# EAGLE board atmega8 (EAGLE 7.1.0)
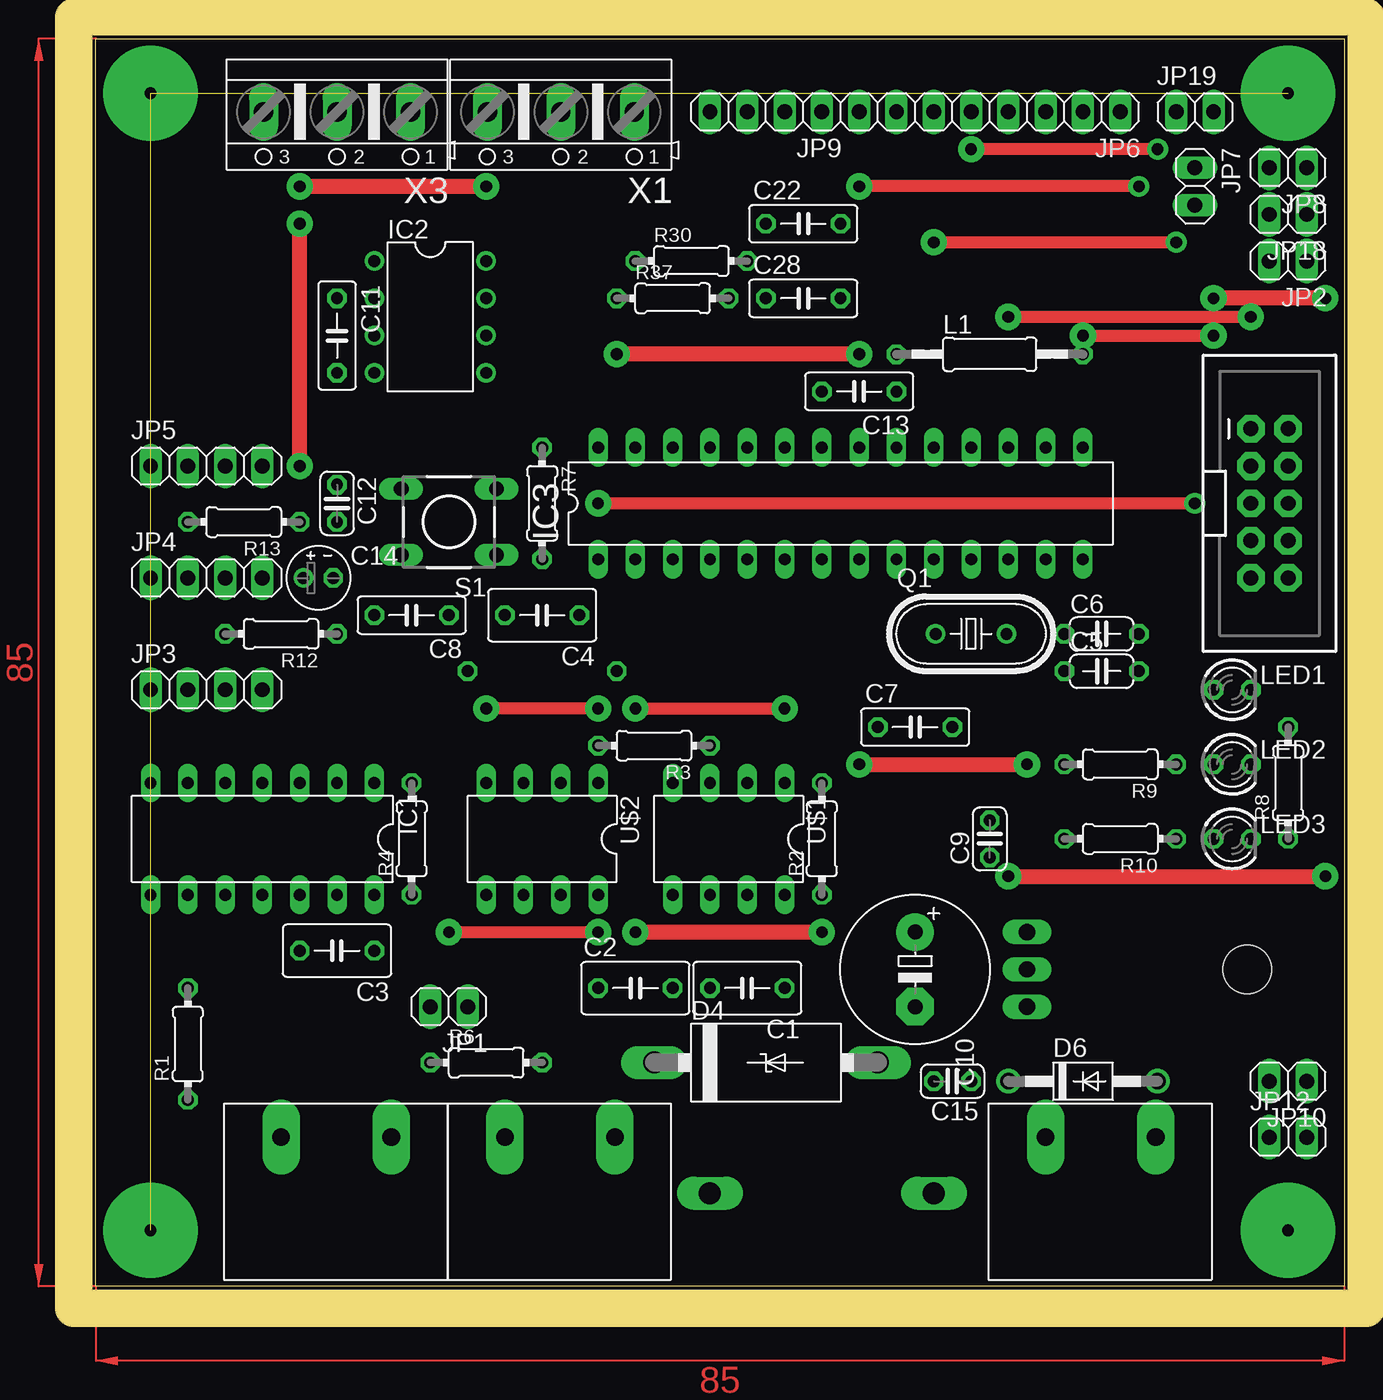
[diagram p0: board, top side]
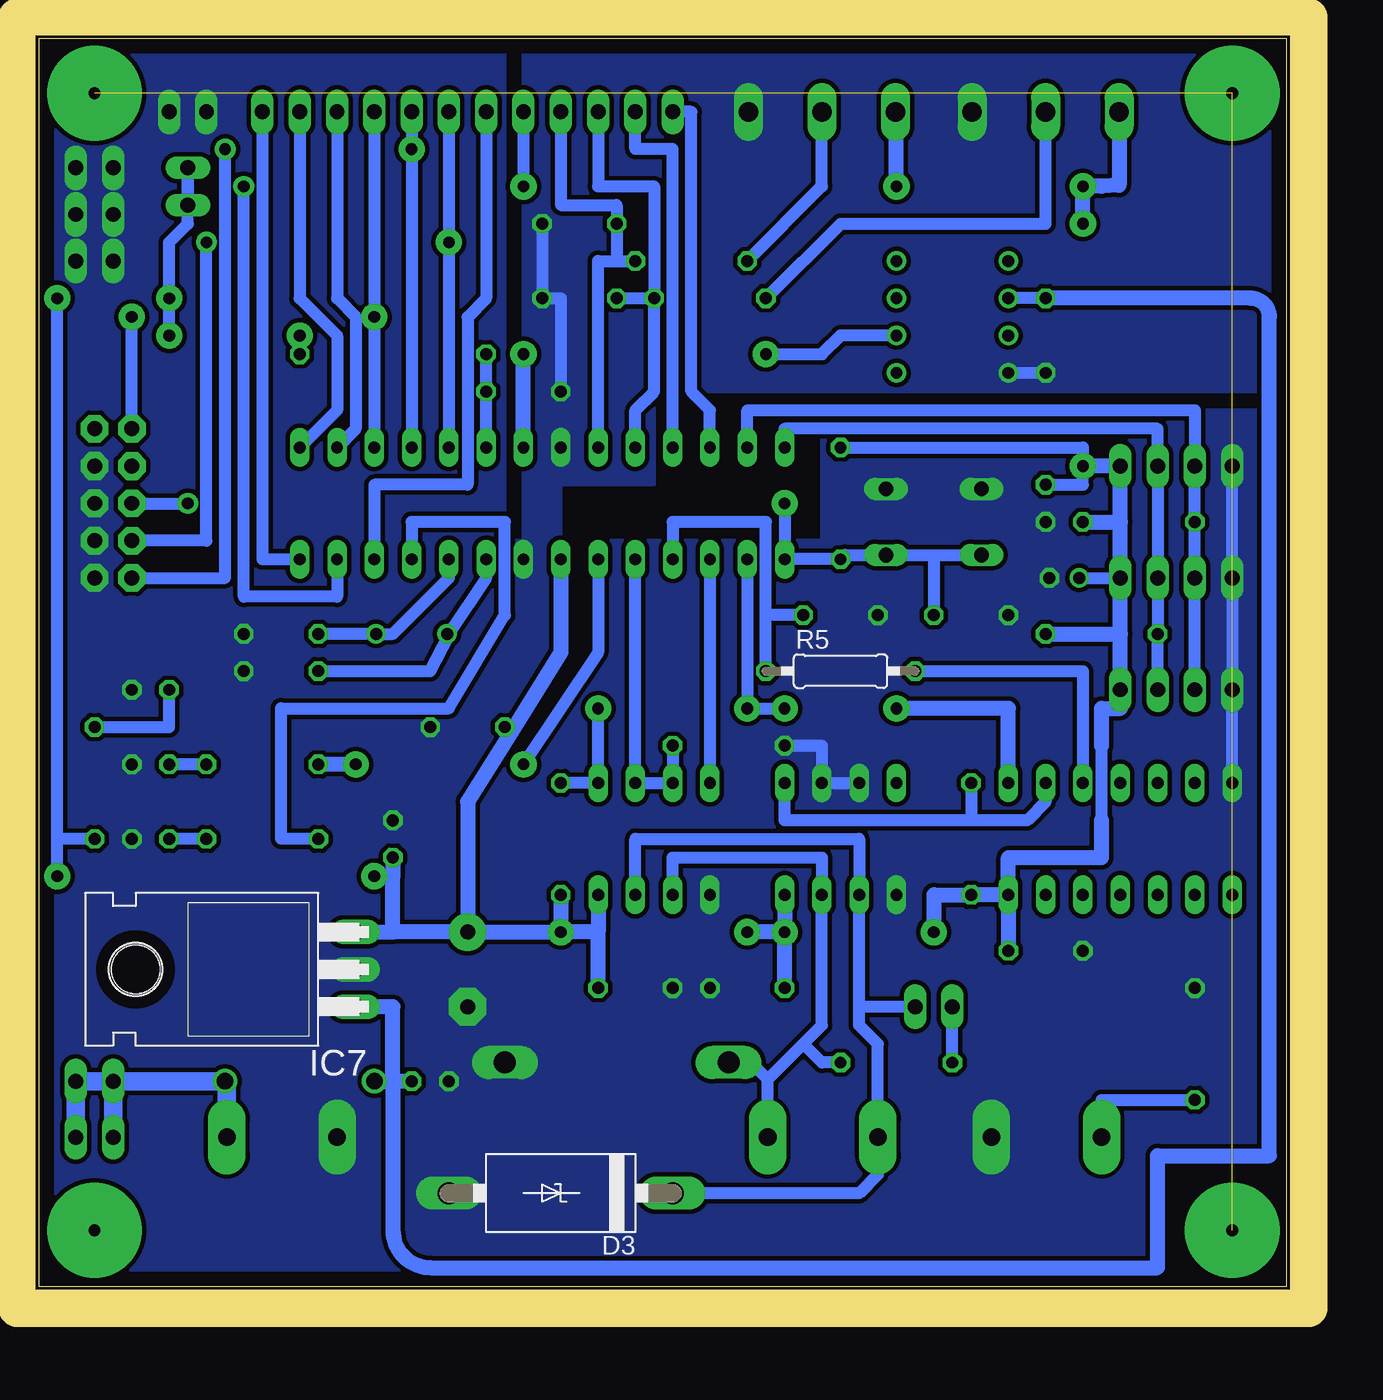
[diagram p1: board, bottom side, seen from below]

Size 85 x 85 mm. Coordinates in mm from the lower left corner, seen from the top.
Outline: 85,0 0,0 0,85 85,85 85,0
Copper layers (1*16): Top 0.035mm / dielectric 1.5mm / Bottom 0.035mm
Design rules "default": minimum track width 10mil, minimum drill 24mil, track to track 8mil, track to pad 8mil, pad to pad 8mil, via to via 8mil, smd to smd 8mil, copper to edge 40mil, drill to drill 8mil, minimum pad ring 10mil, minimum via ring 8mil, stop-mask expansion 4mil, vias tented up to drill 0mil, thermal gap 10mil
Milling: 4 lines

## Footprints (pad centres in the part's own frame; a part is rotated, then mirrored left to right if it is on the bottom)
C050-035X075 = drill 0.813 octagon: 1 -2.54,0; 2 2.54,0
C050-024X044 = drill 0.813 octagon: 1 -2.54,0; 2 2.54,0
C050-025X075 = drill 0.813 octagon: 1 -2.54,0; 2 2.54,0
C025-024X044 = drill 0.813 octagon: 1 -1.27,0; 2 1.27,0
E5-10,5 = drill 1.016 pad 2.54: + -2.54,0 | drill 1.016 pad 2.54 octagon: - 2.54,0
E2-4 = drill 0.813 pad 1.27: + -1.016,0 | drill 0.813 pad 1.27 octagon: - 1.016,0
C4111-15 = drill 1.499 long: A 7.62,0; C -7.62,0
DO41-10 = drill 1.118: A 5.08,0; C -5.08,0
DIL14 = drill 0.813 long: 1 -7.62,-3.81; 2 -5.08,-3.81; 3 -2.54,-3.81; 4 0,-3.81; 5 2.54,-3.81; 6 5.08,-3.81; 7 7.62,-3.81; 8 7.62,3.81; 9 5.08,3.81; 10 2.54,3.81; 11 0,3.81; 12 -2.54,3.81; 13 -5.08,3.81; 14 -7.62,3.81
DIL08 = drill 0.813 pad 1.27: 1 -3.81,-3.81; 2 -1.27,-3.81; 3 1.27,-3.81; 4 3.81,-3.81; 5 3.81,3.81; 6 1.27,3.81; 7 -1.27,3.81; 8 -3.81,3.81
DIL28-3 = drill 0.813 long: 1 -16.51,-3.81; 2 -13.97,-3.81; 3 -11.43,-3.81; 4 -8.89,-3.81; 5 -6.35,-3.81; 6 -3.81,-3.81; 7 -1.27,-3.81; 8 1.27,-3.81; 9 3.81,-3.81; 10 6.35,-3.81; 11 8.89,-3.81; 12 11.43,-3.81; 13 13.97,-3.81; 14 16.51,-3.81; 15 16.51,3.81; 16 13.97,3.81; 17 11.43,3.81; 18 8.89,3.81; 19 6.35,3.81; 20 3.81,3.81; 21 1.27,3.81; 22 -1.27,3.81; 23 -3.81,3.81; 24 -6.35,3.81; 25 -8.89,3.81; 26 -11.43,3.81; 27 -13.97,3.81; 28 -16.51,3.81
TO220H = drill 1.118 long: 1 -2.54,-10.16; 2 0,-10.16; 3 2.54,-10.16 | hole 3.302: 0,4.826
1X02 = drill 1.016 long: 1 -1.27,0; 2 1.27,0
1X04 = drill 1.016 long: 1 -3.81,0; 2 -1.27,0; 3 1.27,0; 4 3.81,0
1X08 = drill 1.016 long: 1 -8.89,0; 2 -6.35,0; 3 -3.81,0; 4 -1.27,0; 5 1.27,0; 6 3.81,0; 7 6.35,0; 8 8.89,0
2X5-SHROUDED = drill 1.016 pad 1.88 octagon: 1 -1.27,5.08; 2 1.27,5.08; 3 -1.27,2.54; 4 1.27,2.54; 5 -1.27,0; 6 1.27,0; 7 -1.27,-2.54; 8 1.27,-2.54; 9 -1.27,-5.08; 10 1.27,-5.08
0207/12 = drill 0.813 octagon: 1 -6.35,0; 2 6.35,0
LED3MM = drill 0.813 octagon: A -1.27,0; K 1.27,0
HC49U70 = drill 0.813: 1 -2.413,0; 2 2.413,0
0204/7 = drill 0.813 octagon: 1 -3.81,0; 2 3.81,0
0207/10 = drill 0.813 octagon: 1 -5.08,0; 2 5.08,0
DTS-6 = drill 1 long: 1 -3.25,2.25; 2 3.25,2.25; 3 -3.25,-2.25; 4 3.25,-2.25
DIL08' = drill 0.813 long: 1 -3.81,-3.81; 2 -1.27,-3.81; 3 1.27,-3.81; 4 3.81,-3.81; 5 3.81,3.81; 6 1.27,3.81; 7 -1.27,3.81; 8 -3.81,3.81
CON-2 = drill 1.2 pad 2.54 long: P$1 -3.81,3.81; P$2 3.69,3.81
AK500/3 = drill 1.321 long: 1 -5.004,0; 2 0,0; 3 5.004,0

## Placement (x,y rotation side)
C1  100n  [C050-035X075]  44.36,20.32 180 top
C2  100n  [C050-035X075]  36.74,20.32 0 top
C3  100n  [C050-035X075]  16.42,22.86 180 top
C4  10n  [C050-035X075]  30.39,45.72 180 top
C5  22pF  [C050-024X044]  68.49,41.91 0 top
C6  22pF  [C050-024X044]  68.49,44.45 0 top
C7  0.1uF  [C050-025X075]  55.79,38.1 0 top
C8  0.1uF  [C050-025X075]  21.5,45.72 180 top
C9  0.1u  [C025-024X044]  60.87,30.48 90 top
C10  470uF  [E5-10,5]  55.79,21.59 270 top
C11  0.1uF  [C050-025X075]  16.42,64.77 270 top
C12  0.1u  [C025-024X044]  16.42,53.34 270 top
C13  0.1uF  [C050-025X075]  51.98,60.96 180 top
C14  10uf  [E2-4]  15.15,48.26 0 top
C15  0.33u  [C025-024X044]  58.33,13.97 180 top
C22  22n  [C050-025X075]  48.17,72.39 0 top
C28  22n  [C050-025X075]  48.17,67.31 0 top
D3  1N6267A  [C4111-15]  49.44,6.35 180 bottom
D4  1N6267A  [C4111-15]  45.63,15.24 0 top
D6  1N4004  [DO41-10]  67.22,13.97 0 top
IC1  74HCT08N  [DIL14]  11.34,30.48 180 top
IC2  REF02Z  [DIL08]  22.77,66.04 270 top
IC3  MEGA8-P  [DIL28-3]  50.71,53.34 0 top
IC7  7805T  [TO220H]  73.57,21.59 90 bottom
JP1  [1X02]  24.04,19.05 180 top
JP2  [1X02]  81.19,69.85 180 top
JP3  [1X04]  7.53,40.64 0 top
JP4  [1X04]  7.53,48.26 0 top
JP5  [1X04]  7.53,55.88 0 top
JP6  [1X08]  60.87,80.01 180 top
JP7  [1X02]  74.84,74.93 270 top
JP8  [1X02]  81.19,76.2 180 top
JP9  [1X04]  45.63,80.01 180 top
JP10  [1X02]  81.19,13.97 180 top
JP11  M05X2SHD  [2X5-SHROUDED]  79.92,53.34 0 top
JP12  [1X02]  81.19,10.16 0 top
JP18  [1X02]  81.19,73.03 180 top
JP19  [1X02]  74.84,80.01 0 top
L1  [0207/12]  60.87,63.5 0 top
LED1  [LED3MM]  77.38,40.64 0 top
LED2  [LED3MM]  77.38,35.56 0 top
LED3  [LED3MM]  77.38,30.48 0 top
Q1  [HC49U70]  59.6,44.45 0 top
R1  100k  [0204/7]  6.26,16.51 90 top
R2  10k  [0204/7]  49.44,30.48 90 top
R3  10k  [0204/7]  38.01,36.83 180 top
R4  10k  [0204/7]  21.5,30.48 90 top
R5  30  [0207/10]  30.39,41.91 0 bottom
R6  120  [0204/7]  26.58,15.24 0 top
R7  10k  [0204/7]  30.39,53.34 270 top
R8  330  [0204/7]  81.19,34.29 90 top
R9  330  [0204/7]  69.76,35.56 180 top
R10  330  [0204/7]  69.76,30.48 180 top
R12  10k  [0204/7]  12.61,44.45 180 top
R13  10k  [0204/7]  10.07,52.07 180 top
R30  2.2k  [0204/7]  40.55,69.85 0 top
R37  2.2k  [0204/7]  39.28,67.31 0 top
S1  DTS-6  [DTS-6]  24.04,52.07 180 top
U$1  MAX3082  [DIL08']  43.09,30.48 180 top
U$2  MAX3082  [DIL08']  30.39,30.48 180 top
U$3  TM-2  [CON-2]  31.66,6.35 0 top
U$4  TM-2  [CON-2]  16.42,6.35 0 top
U$5  TM-2  [CON-2]  68.49,6.35 0 top
X1  [AK500/3]  31.66,80.01 180 top
X3  [AK500/3]  16.42,80.01 180 top

## Library data of the parts
C1-C15 C22 C28 L1 R5 R7-R10 R30 R37 = rcl
D3 D4 D6 = diode
IC1 = 74xx-eu
IC2 IC7 = linear
IC3 = atmel; OC_FARNELL: unknown; OC_NEWARK: unknown
JP1-JP10 JP12 JP18 JP19 = pinhead
JP11 = SparkFun
LED1-LED3 = led
Q1 = crystal; OC_FARNELL: unknown; OC_NEWARK: unknown
R1-R4 R6 R12 R13 = resistor
S1 = switch-tact
U$1 U$2 = maxim
U$3-U$5 = connetors_my
X1 X3 = con-ptr500; OC_FARNELL: unknown; OC_NEWARK: unknown

## Nets
+12V: C11.1 C15.1 D6.C IC2.2 IC7.1
AREF: IC2.6 IC3.21
DI: IC3.3 U$1.4
DIR: IC3.5 R3.1 U$1.2 U$1.3
GND: C1.2 C2.2 C3.2 C4.2 C5.2 C6.2 C7.2 C8.2 C9.2 C10.- C11.2 C12.2 C13.2 C14.- C15.2 C22.2 C28.2 D3.A D4.A IC1.7 IC2.4 IC3.8 IC3.22 IC7.2 JP2.1 JP2.2 JP3.1 JP4.1 JP5.1 JP8.1 JP8.2 JP11.4 JP11.6 JP11.8 JP11.10 JP18.1 JP18.2 JP19.1 JP19.2 LED1.K LED2.K LED3.K R1.2 R3.2 S1.3 S1.4 U$1.5 U$2.2 U$2.3 U$2.5 U$4.P$2 U$5.P$1 X1.1 X3.1
MISO: IC3.18 JP6.5 JP11.9
MOSI: IC3.17 JP6.4 JP11.1
N$1: LED1.A R8.2
N$2: D4.C R6.2 U$1.6 U$2.7 U$3.P$2
N$3: IC1.2 R4.2 U$2.1
N$5: LED3.A R10.1
N$7: IC1.3 R5.2
N$8: JP1.2 R6.1
N$9: D3.C JP1.1 U$1.7 U$2.6 U$3.P$1
N$10: C13.1 IC3.20 L1.1
N$12: D6.A JP10.1 JP10.2 JP12.1 JP12.2 U$5.P$2
N$13: IC3.14 JP6.1
N$14: IC3.15 JP6.2
N$15: IC3.16 JP6.3
N$16: IC3.12 JP6.7
N$17: IC3.13 JP6.8
N$18: IC3.28 JP3.3 JP4.3 JP5.3 R12.2
N$23: IC3.27 JP3.2 JP4.2 JP5.2 R13.2
N$25: IC3.6 R9.2
N$26: IC3.11 R10.2
N$28: LED2.A R9.1
N$47: R30.1 X1.2
N$71: R37.1 X3.2
PC0: C22.1 IC3.23 JP9.1 R30.2
PC1: C28.1 IC3.24 JP9.2 R37.2
PC2: IC3.25 JP9.3
PC3: IC3.26 JP9.4
PE: R1.1 U$4.P$1
RESET: C8.1 IC3.1 JP11.5 R7.2 S1.1 S1.2
RO: IC1.1 IC3.2 R2.2 U$1.1
SCK: IC3.19 JP6.6 JP11.7
SL: C4.1 IC3.4 R5.1
VCC: C1.1 C2.1 C3.1 C7.1 C9.1 C10.+ C12.1 C14.+ IC1.14 IC3.7 IC7.3 JP3.4 JP4.4 JP5.4 JP7.1 JP7.2 L1.2 R2.1 R4.1 R7.1 R8.1 R12.1 R13.1 U$1.8 U$2.8 X1.3 X3.3
XTAL1: C5.1 IC3.9 Q1.1
XTAL2: C6.1 IC3.10 Q1.2

## Tracks (layer width: path | path; a pad name or v marks a point on that pad's centre or on a via)
+12V
  Bottom 0.813: C11.1 IC2.2
  Bottom 1.016: 60.87,13.97 60.87,19.05 IC7.1 | D6.C 60.87,13.97 | 60.87,13.97 60.87,3.81 arc-90 58.33,1.27 8.8,1.27 8.8,8.89 1.18,8.89 1.18,66.04 arc-90 2.45,67.31 C11.1 | C15.1 60.87,13.97
AREF  (via drill 0.8 pad 1.78)
  Top 1.016: v51.98,63.5 v35.47,63.5
  Bottom 0.813: v35.47,63.5 31.66,63.5 30.39,64.77 IC2.6
  Bottom 1.016: IC3.21 v51.98,63.5
DI
  Bottom 0.813: IC3.3 U$1.4
DIR
  Bottom 0.813: IC3.5 U$1.2 U$1.3 R3.1
GND
  Bottom 0.813: U$2.3 U$2.2 31.66,36.83 R3.2 | JP5.1 JP4.1 JP3.1 IC1.7 | S1.3 27.58,54.61 | C13.2 49.44,67.31 C28.2 C22.2 | IC2.4 C11.2
  pour Bottom (isolate 0.305, no thermals): 86.27,-1.27 -1.36,-1.27 -1.36,59.69 31.66,59.69 31.66,50.8 53.25,50.8 53.25,66.04 53.25,85.09 86.27,85.09
  pour Bottom (isolate 0.305, no thermals): -0.09,85.09 51.98,85.09 51.98,50.8 49.44,50.8 49.44,54.61 43.09,54.61 43.09,60.96 -0.09,60.96
MISO  (via drill 0.8 pad 1.42, 0.8 pad 1.78)
  Top 0.813: v72.3,77.47 v59.6,77.47
  Bottom 0.813: JP6.5 v59.6,77.47 IC3.18 | v72.3,77.47 72.3,48.26 JP11.9
MOSI  (via drill 0.8 pad 1.78)
  Top 0.813: v78.65,66.04 v62.14,66.04
  Bottom 0.813: JP6.4 v62.14,66.04 IC3.17 | JP11.1 v78.65,66.04
N$1
  Bottom 0.813: R8.2 76.11,38.1 LED1.A
N$2
  Bottom 0.813: U$1.6 41.82,29.21 31.66,29.21 U$2.7 31.66,17.78 32.93,16.51 | U$3.P$2 35.35,14.09 | 35.35,14.09 32.93,16.51 | R6.2 31.66,15.24 32.93,16.51 | D4.C 36.5,15.24 35.35,14.09
N$3
  Bottom 0.813: 21.5,31.75 17.69,31.75 16.42,33.02 IC1.2 | 21.5,31.75 34.2,31.75 U$2.1 | R4.2 21.5,31.75
N$4  (via drill 0.8 pad 6.45)
  other vias: 81.19,3.81
N$5
  Bottom 0.813: R10.1 LED3.A
N$7
  Bottom 0.813: R5.2 13.88,41.91 IC1.3
N$8
  Bottom 0.813: R6.1 JP1.2
N$9
  Bottom 0.813: U$1.7 44.36,30.48 29.12,30.48 U$2.6 29.12,19.05 | 29.12,19.05 29.12,17.78 27.85,16.51 U$3.P$1 27.85,7.62 29.12,6.35 D3.C | JP1.1 29.12,19.05
N$10
  Bottom 0.813: IC3.20 C13.1 L1.1
N$11  (via drill 0.8 pad 6.45)  (2 unrouted)
  other vias: 3.72,81.28 81.19,81.28 3.72,3.81
N$12
  Bottom 1.27: U$5.P$2 72.18,13.85 D6.A JP10.2 | JP10.2 JP10.1 JP12.2 | JP12.1 JP10.2
N$13
  Bottom 0.813: JP6.1 69.76,49.53 IC3.14
N$14
  Bottom 0.813: JP6.2 67.22,67.31 64.68,64.77 64.68,59.69 IC3.15
N$15
  Bottom 0.813: JP6.3 64.68,67.31 63.41,66.04 63.41,58.42 IC3.16
N$16
  Bottom 0.813: JP6.7 54.52,67.31 55.79,66.04 55.79,54.61 62.14,54.61 IC3.12
N$17  (via drill 0.8 pad 1.42, 0.8 pad 1.78)
  Top 0.813: v71.03,74.93 v51.98,74.93
  Bottom 0.813: JP6.8 v51.98,74.93 | IC3.13 64.68,46.99 71.03,46.99 v71.03,74.93
N$18
  Bottom 0.813: IC3.28 34.2,58.42 8.8,58.42 JP5.3 JP4.3 R12.2 JP3.3
N$23
  Bottom 0.813: IC3.27 36.74,59.69 6.26,59.69 JP5.2 R13.2 JP4.2 JP3.2
N$25  (via drill 0.8 pad 1.78)
  Top 1.016: v51.98,35.56 v63.41,35.56
  Bottom 0.813: IC3.6 46.9,43.18 v51.98,35.56
  Bottom 1.016: v63.41,35.56 R9.2
N$26
  Bottom 0.813: R10.2 68.49,30.48 68.49,39.37 57.06,39.37 53.25,45.72 53.25,52.07 59.6,52.07 IC3.11
N$28
  Bottom 0.813: R9.1 LED2.A
N$47
  Bottom 0.813: R30.1 31.66,74.93 X1.2
N$71
  Bottom 0.813: R37.1 30.39,72.39 16.42,72.39 X3.2
PC0
  Bottom 0.813: JP9.1 49.44,73.66 45.63,73.66 C22.1 45.63,69.85 | IC3.23 46.9,69.85 45.63,69.85 | 45.63,69.85 R30.2
PC1
  Bottom 0.813: IC3.24 44.36,59.69 43.09,60.96 R37.2 | JP9.2 46.9,74.93 43.09,74.93 R37.2 | C28.1 R37.2
PC2
  Bottom 0.813: IC3.25 41.82,77.47 44.36,77.47 JP9.3
PC3
  Bottom 0.813: IC3.26 39.28,59.69 40.55,60.96 40.55,80.01 JP9.4
PE
  Bottom 0.813: U$4.P$1 12.61,12.7 R1.1
RESET  (via drill 0.8 pad 1.42, 0.8 pad 1.78)
  Top 0.813: v74.84,53.34 v34.2,53.34
  Bottom 0.813: C8.1 24.04,49.8 S1.2 S1.1 30.1,49.82 R7.2 IC3.1 v34.2,53.34 | JP11.5 v74.84,53.34
RO  (via drill 0.8 pad 1.78)
  Top 0.813: v36.74,39.37 v46.9,39.37 | v34.2,39.37 v26.58,39.37
  Bottom 0.813: R2.2 U$1.1 v46.9,39.37 | IC3.2 v36.74,39.37 v34.2,39.37
  Bottom 1.016: IC1.1 18.96,39.37 v26.58,39.37
SCK  (via drill 0.8 pad 1.42, 0.8 pad 1.78)
  Top 0.813: v57.06,71.12 v73.57,71.12
  Bottom 0.813: JP6.6 v57.06,71.12 IC3.19 | v73.57,71.12 73.57,50.8 JP11.7
SL
  Bottom 0.813: IC3.4 41.82,52.07 35.47,52.07 35.47,45.72 | C4.1 35.47,45.72 | R5.1 35.47,45.72
VCC  (via drill 0.8 pad 1.78)
  Top 0.813: v67.22,64.77 v76.11,64.77 | v24.04,24.13 v34.2,24.13
  Top 1.016: v36.74,24.13 v49.44,24.13 | v13.88,55.88 v13.88,72.39 | v13.88,74.93 v26.58,74.93 | v62.14,27.94 v83.73,27.94 | v83.73,67.31 v76.11,67.31
  Bottom 0.813: R7.1 13.88,57.15 v13.88,55.88 13.88,54.61 C12.1 | C7.1 53.08,38.1 52.79,37.81 | 12.61,31.75 12.61,36.83 | JP7.2 JP7.1 74.84,72.39 76.11,71.12 v76.11,67.31 v76.11,64.77 | C14.+ JP4.4 | v83.73,27.94 83.73,30.48 | 83.73,30.48 v83.73,67.31 | R8.1 83.73,30.48
  Bottom 1.016: U$2.8 v34.2,24.13 | v34.2,24.13 v36.74,24.13 | C2.1 v34.2,24.13 | U$1.8 46.9,24.13 | 46.9,24.13 v49.44,24.13 | C1.1 46.9,24.13 | R2.1 v49.44,24.13 | C10.+ v49.44,24.13 | IC3.7 49.44,43.18 52.79,37.81 55.79,33.02 C10.+ | v13.88,72.39 v13.88,74.93 12.61,74.93 11.42,75.01 X3.3 | v26.58,74.93 26.58,79.93 X1.3 | L1.2 v67.22,64.77 | 11.34,44.45 JP3.4 11.34,39.37 12.61,39.37 12.61,36.83 | 11.34,44.45 JP4.4 11.34,52.07 | 11.34,52.07 JP5.4 v13.88,55.88 | R13.1 11.34,52.07 | IC1.14 R4.1 24.04,26.67 v24.04,24.13 | IC1.14 C3.1 | R12.1 11.34,44.45 | IC1.14 18.96,29.21 12.61,29.21 12.61,31.75 | 60.87,27.94 v62.14,27.94 | C9.1 60.87,27.94 | IC7.3 60.87,24.13 | 60.87,24.13 60.87,27.94 | C10.+ 60.87,24.13
XTAL1
  Bottom 0.813: IC3.9 54.52,48.26 57.06,44.45 57.06,44.58 Q1.1 57.06,44.32 58.33,41.91 C5.1
XTAL2
  Bottom 0.813: C6.1 Q1.2 60.87,44.45 57.06,48.26 IC3.10
(copper drawn outside any net)
  shapes: Top area x2